# EAGLE board single_channel_-_Rev_B_-_Part_2 (EAGLE 6.1)
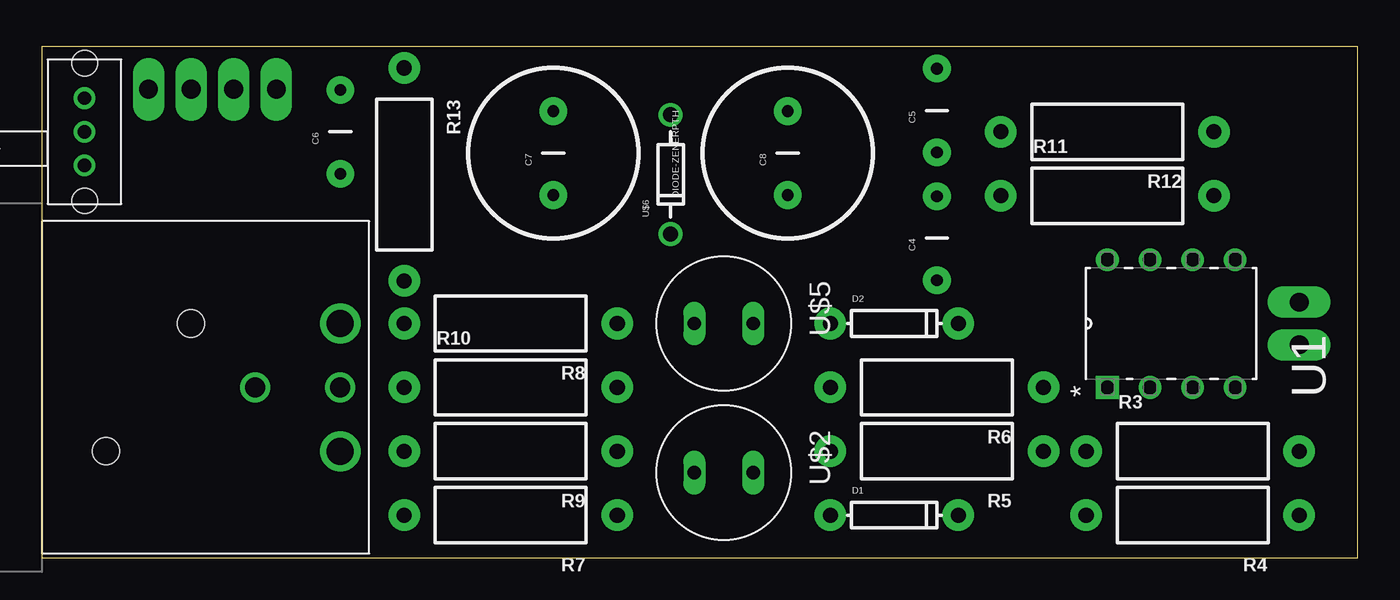
[diagram p0: board, top side]
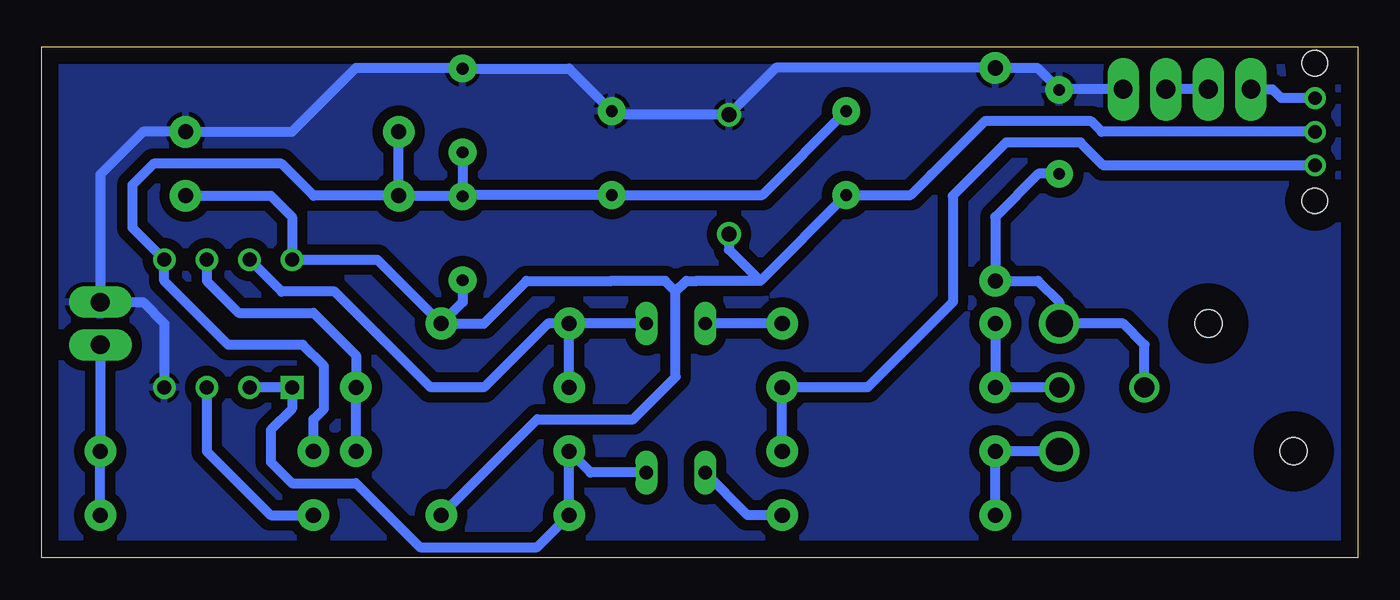
[diagram p1: board, bottom side, seen from below]

Size 78.41 x 30.47 mm. Coordinates in mm from the lower left corner, seen from the top.
Outline: 0,0 78.41,0 78.41,30.47 0,30.47 0,0
Copper layers (1*16): Top 0.035mm / dielectric 1.5mm / Bottom 0.035mm
Design rules: minimum track width 10mil, minimum drill 24mil, track to track 8mil, track to pad 8mil, pad to pad 8mil, via to via 8mil, smd to smd 8mil, copper to edge 40mil, drill to drill 8mil, minimum pad ring 10mil, minimum via ring 8mil, stop-mask expansion 4mil, vias tented up to drill 0mil, thermal gap 10mil

## Footprints (pad centres in the part's own frame; a part is rotated, then mirrored left to right if it is on the bottom)
CAP-PTH-5MM = drill 0.7 pad 1.651: 1 -2.5,0; 2 2.5,0
DIODE-1N4148 = drill 0.9 pad 1.88: A -3.81,0; C 3.81,0
1X02_LONGPADS = drill 1.118 pad 1.88 long: 1 0,0; 2 2.54,0
AXIAL-0.5 = drill 0.9 pad 1.88: P$1 -6.35,0; P$2 6.35,0
DIP254P762X508-8 = drill 0.838 square: 1 -7.62,7.62 | drill 0.838: 2 -7.62,5.08; 3 -7.62,2.54; 4 -7.62,0; 5 0,0; 6 0,2.54; 7 0,5.08; 8 0,7.62
AC3MAH = drill 1.6: 1 3.81,-17.78; 2 -3.81,-17.78 | drill 1.2: 3 0,-17.78; G 0,-12.7 | hole 1.6: 3.81,-8.89; -3.81,-3.81
8MM = drill 0.8 long: P$1 0,1.75; P$2 0,-1.75
SPDT-SLIDE = drill 0.787: 1 -2.007,0; 2 0,0; 3 2.007,0 | hole 1.499: -4.089,0; 4.115,0
DIODE-ZENER = drill 0.9: P$1 -3.556,0; P$2 3.556,0

## Placement (x,y rotation side)
C4  100nF  [CAP-PTH-5MM]  53.34,19.05 90 top
C5  100nF  [CAP-PTH-5MM]  53.34,26.67 90 top
C6  [CAP-PTH-5MM]  17.78,25.4 90 top
C7  470uF  [CAP-PTH-5MM]  30.48,24.13 90 top
C8  470uF  [CAP-PTH-5MM]  44.45,24.13 90 top
D1  [DIODE-1N4148]  50.8,2.54 0 top
D2  [DIODE-1N4148]  50.8,13.97 0 top
JP2  [1X02_LONGPADS]  6.35,27.94 0 top
JP3  [1X02_LONGPADS]  11.43,27.94 0 top
JP4  [1X02_LONGPADS]  74.93,12.7 90 top
R3  [AXIAL-0.5]  68.58,6.35 0 top
R4  [AXIAL-0.5]  68.58,2.54 180 top
R5  [AXIAL-0.5]  53.34,6.35 180 top
R6  [AXIAL-0.5]  53.34,10.16 180 top
R7  [AXIAL-0.5]  27.94,2.54 180 top
R8  [AXIAL-0.5]  27.94,13.97 180 top
R9  [AXIAL-0.5]  27.94,6.35 180 top
R10  [AXIAL-0.5]  27.94,10.16 0 top
R11  [AXIAL-0.5]  63.5,21.59 0 top
R12  [AXIAL-0.5]  63.5,25.4 180 top
R13  [AXIAL-0.5]  21.59,22.86 270 top
U1  TL072CP  [DIP254P762X508-8]  71.12,17.78 90 top
U$1  AC3M  [AC3MAH]  0,10.16 90 top
U$2  CAP8MM  [8MM]  40.64,5.08 270 top
U$4  SPDT  [SPDT-SLIDE]  2.54,25.4 270 top
U$5  CAP8MM  [8MM]  40.64,13.97 270 top
U$6  DIODE-ZENERPTH  [DIODE-ZENER]  37.47,22.86 90 top

## Library data of the parts
C4-C6 D1 D2 R3-R13 U$6 = SparkFun
C7 C8 = SparkFun-Passives
JP2-JP4 = SparkFun-Connectors
U1 = ic-amplifiers; DESCRIPTION: OPERATIONAL AMPLIFIER; MPN: TL072CP; OC_FARNELL: 1106015; OC_NEWARK: 60K6988; PACKAGE: PDIP; SUPPLIER: Texas Instruments
U$1 = con-audio
U$2 U$5 = passive-capacitors
U$4 = switches

## Nets
GND: C5.2 C6.2 C8.2 JP3.2 JP4.2 R12.P$1 R13.P$1 U1.4 U$6.P$2
N$6: JP4.1 R3.P$2 R4.P$1
N$7: D1.A R5.P$2 U1.1 U1.2 U$2.P$1
N$8: R4.P$2 U1.3
N$9: R5.P$1 R6.P$1 U1.6
N$10: C4.2 C5.1 C7.2 C8.1 R3.P$1 R11.P$1 R12.P$2 U1.5
N$11: C4.1 C7.1 D1.C D2.C R11.P$2 U1.8 U$4.2 U$6.P$1
N$12: D2.A R6.P$2 U1.7 U$5.P$1
N$13: R8.P$2 R10.P$1 U$1.3
N$14: R9.P$1 R10.P$2 U$4.3
N$15: R7.P$2 R9.P$2 U$1.2
N$16: R7.P$1 U$2.P$2
N$17: R8.P$1 U$5.P$2
N$18: JP2.2 JP3.1
N$19: JP2.1 U$4.1
N$20: C6.1 R13.P$2 U$1.1 U$1.G

## Tracks (layer width: path | path; a pad name or v marks a point on that pad's centre or on a via)
GND
  Bottom 0.61: JP3.2 17.74,27.94 C6.2 19.09,29.21 R13.P$1 34.67,29.21 U$6.P$2 44.24,26.42 C8.2 46.99,29.17 C5.2 53.34,29.21 59.69,29.21 63.5,25.4 R12.P$1 72.39,25.4 74.93,22.86 JP4.2 72.39,15.24 71.12,13.97 U1.4
  pour Bottom (isolate 0.61): 0,0 0,30.48 78.74,30.48 78.74,0
N$6
  Bottom 0.61: R4.P$1 R3.P$2 JP4.1
N$7
  Bottom 0.61: U1.2 U1.1 63.5,8.89 64.77,7.62 64.77,5.71 63.5,4.45 59.69,4.45 55.88,0.64 48.9,0.64 D1.A R5.P$2 45.72,5.08 U$2.P$1
N$8
  Bottom 0.61: U1.3 68.58,6.35 64.77,2.54 R4.P$2
N$9
  Bottom 0.61: U1.6 68.58,16.51 66.67,14.61 62.23,14.61 59.69,12.06 R6.P$1 R5.P$1
N$10
  Bottom 0.61: R3.P$1 62.23,8.26 61.59,8.89 61.59,11.43 62.87,12.7 67.31,12.7 71.12,16.51 U1.5 73.03,19.68 73.03,22.23 71.75,23.5 64.14,23.5 62.23,21.59 R11.P$1 | 57.11,25.4 R12.P$2 R11.P$1 | C5.1 C4.2 | R11.P$1 53.38,21.59 C4.2 | C4.2 53.26,21.63 C8.1 35.48,21.63 C7.2
N$11
  Bottom 0.61: U$4.2 15.24,25.4 15.88,26.04 22.23,26.04 25.4,22.86 26.63,21.63 C7.1 35.6,16.51 | D1.C 48.9,8.26 43.18,8.26 40.64,10.79 40.64,15.88 | D2.C 58.42,17.78 U1.8 63.5,20.32 64.77,21.59 R11.P$2 | D2.C 52.07,13.97 49.53,16.51 44.45,16.51 41.27,16.51 40.64,15.88 | 35.6,16.51 39.37,16.51 40.01,16.51 40.64,15.88 | U$6.P$1 37.47,18.38 35.6,16.51 | C4.1 53.34,15.24 D2.C
N$12
  Bottom 0.61: U$5.P$1 D2.A | R6.P$2 D2.A | D2.A 48.26,13.97 52.07,10.16 55.24,10.16 60.96,15.88 64.14,15.88 U1.7
N$13
  Bottom 0.61: U$1.3 R10.P$1 R8.P$2
N$14
  Bottom 0.61: R9.P$1 R10.P$2 29.21,10.16 24.13,15.24 24.13,21.59 20.95,24.77 16.51,24.77 15.14,23.39 U$4.3
N$15
  Bottom 0.61: U$1.2 R9.P$2 R7.P$2
N$16
  Bottom 0.61: R7.P$1 36.35,2.54 U$2.P$2
N$17
  Bottom 0.61: R8.P$1 U$5.P$2
N$18
  Bottom 0.61: JP2.2 JP3.1
N$19
  Bottom 0.61: JP2.1 5.08,27.94 4.55,27.41 U$4.1
N$20
  Bottom 0.61: U$1.G 12.7,12.7 13.97,13.97 U$1.1 17.78,15.24 19.05,16.51 R13.P$2 21.59,20.32 19.01,22.9 C6.1